# Altium PCB DE-151116.PcbDoc
Units mm, origin at the board's own origin, x right, y up, seen from the top; angles counter-clockwise.
Board outline 80 x 43 mm, 2 copper layers (Top Layer, Bottom Layer); 27 components, 18 nets, 67 pads, 0 vias.
Unrouted connection lines stored in the file: 1.
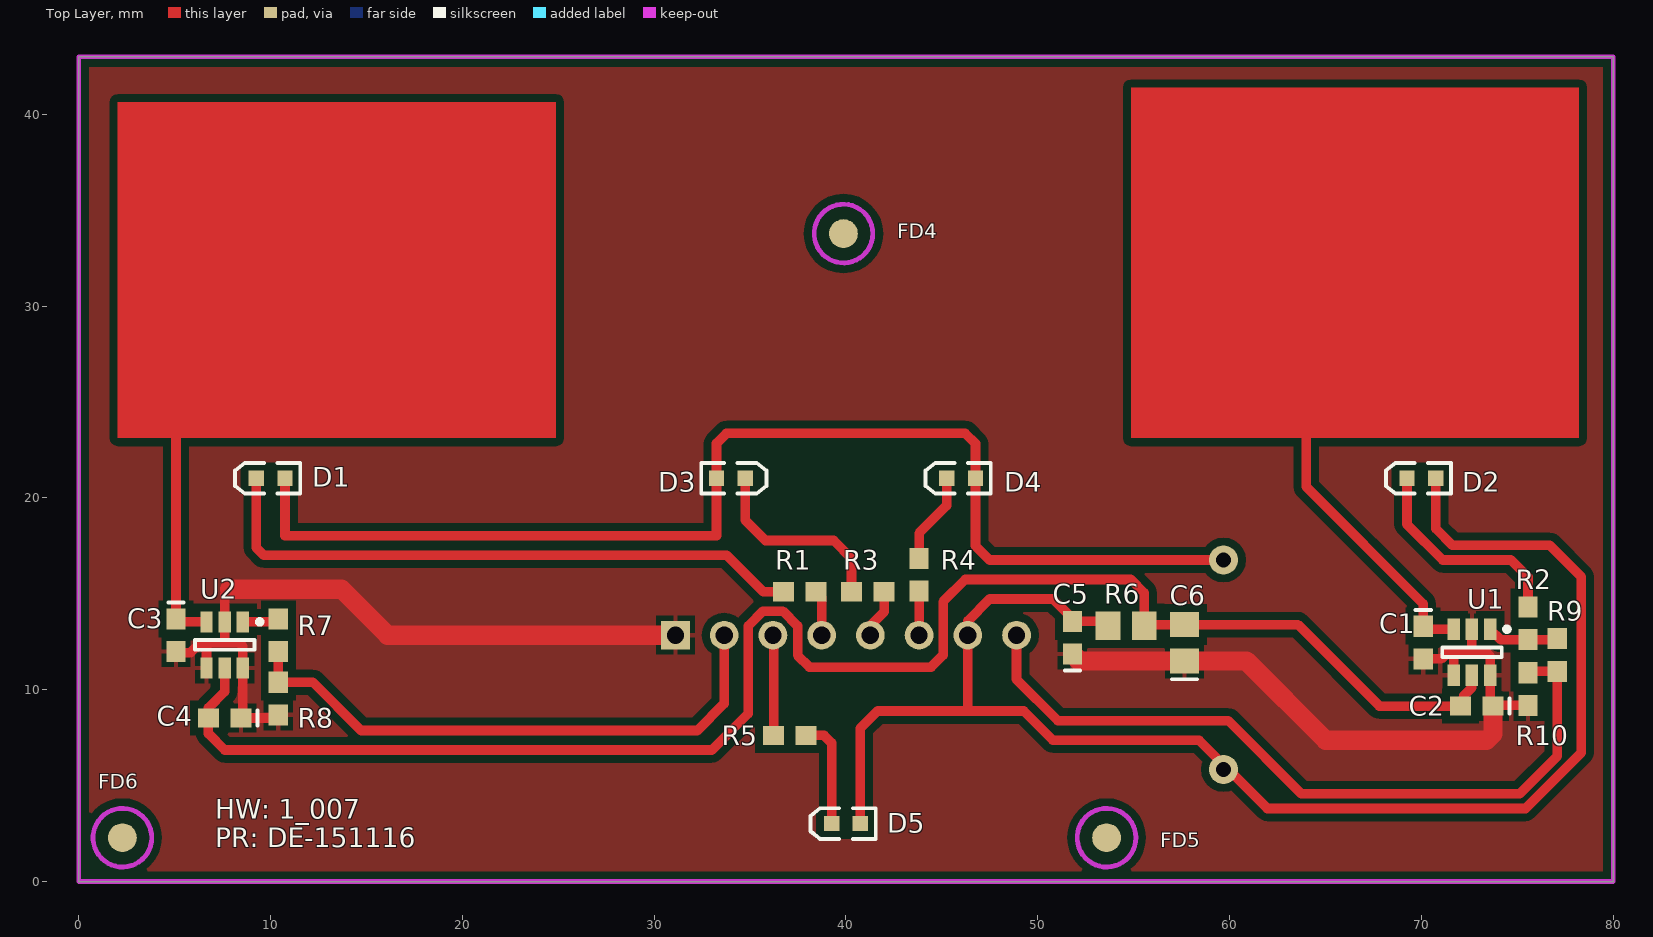
[diagram p0: Top Layer view]
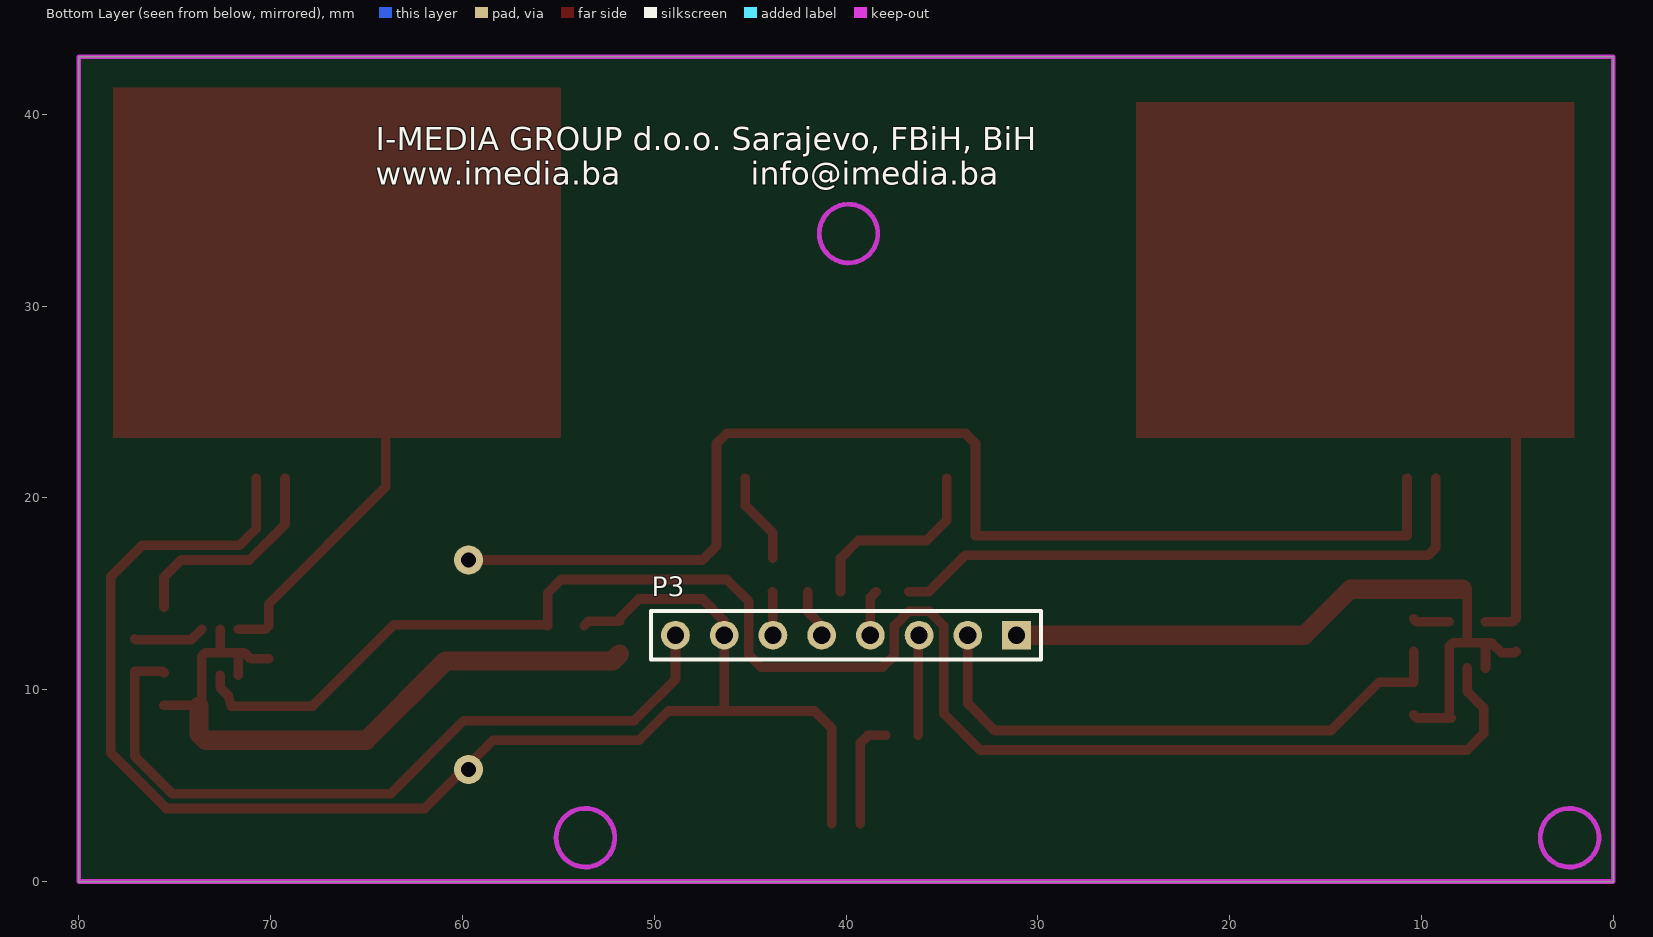
[diagram p1: Bottom Layer view, seen from below]

## Layer stack, top to bottom
Top Solder: solder mask 0.0102, Solder Resist, Dk 3.5
Top Layer: signal copper 0.0356
Dielectric 1: dielectric 0.32, FR-4, Dk 4.8
Bottom Layer: signal copper 0.0356
Bottom Solder: solder mask 0.0102, Solder Resist, Dk 3.5

## Board outline
0,0 80,0 80,43 0,43

## Design rules (kind name [scope] priority, off if disabled: settings)
Clearance [All] p1: gap=0.254 except(0.4: Arc-Poly Track-Poly SMDPad-Poly THPad-Poly Via-Poly Fill-Poly Poly-Poly)
PolygonConnect [All] p1: connectstyle=Relief reliefconductorwidth=0.254 reliefentries=4 polygonreliefangle="90 Angle" airgapwidth=0.254
RoutingVias [All] p1: holewidth=0.711 width=1.27 viastyle="Through Hole" minholewidth=0.711 minwidth=1.27 maxholewidth=0.711 maxwidth=1.27
SolderMaskExpansion [All] p1: expansion=0.102
Width [All] p1: maxlimit=5 minlimit=0.254 preferedwidth=0.5
30 further rules are at their usual default settings.

## Classes and differential pairs
component class DE-151116: C1 C2 C3 C4 C5 C6 D1 D2 D3 D4 D5 P3 R1 R2 R3 R4 R5 R6 R7 R8 R9 R10 U1 U2

## Components (designator, comment, footprint, x,y, rotation, side; value= is the part's Value field where it differs from the comment)
C1 "10pF" 0603 70.094,12.462 r270 top
C2 "C0603" 0603 72.888,9.144 r180 top
C3 "10pF" 0603 5.07,12.843 r270 top
C4 "100nF" 0603 7.61,8.525 r180 top
C5 "100nF" 0603 51.806,12.711 r90 top
C6 "4u7" 0805 57.648,12.446 r90 top
D1 "RED_LED" 1.6X0.8X0.8 10,21.024 r180 top
D2 "BLUE_LED" 1.6X0.8X0.8 70,21.024 r180 top
D3 "RED_LED" 1.6X0.8X0.8 34,21.024 r0 top
D4 "GREEN_LED" 1.6X0.8X0.8 46,21.024 r180 top
D5 "WHITE_LED" 1.6X0.8X0.8 40,3.024 r180 top
FD4 "Fiducial" Fiducial 39.868,33.782 r180 bottom
FD5 "Fiducial" Fiducial 53.584,2.286 r180 bottom (schematic designator FD4)
FD6 "Fiducial" Fiducial 2.276,2.286 r180 bottom (schematic designator FD4)
P3 "Header 8" HDR1X8 31.11,12.843 r0 bottom
R1 "330R" ERA-0603 37.582,15.113 r180 top
R2 "180R" ERA-0603 75.555,13.462 r90 top
R3 "330R" ERA-0603 41.138,15.113 r180 top
R4 "330R" ERA-0603 43.81,16.002 r90 top
R5 "180R" ERA-0603 37.074,7.62 r0 top
R6 "15R" ERA-0805 54.6,13.335 r0 top
R7 "2K2" ERA-0603 10.404,12.843 r270 top
R8 "3K3" ERA-0603 10.404,9.541 r270 top
R9 "2K2" ERA-0603 77.079,11.811 r270 top
R10 "3K3" ERA-0603 75.555,10.033 r270 top
U1 "TTP223-BA6" 6ST1_N 72.634,11.954 r270 top
U2 "TTP223-BA6" 6ST1_N 7.61,12.335 r270 top

## Footprints (in the part's own frame and the unit in brackets; to place one, negate y for a bottom-side part, rotate by r counter-clockwise, add the part's x,y. Pads: shape width x height; smd on the part's side, far side on the other; paste and mask are expansions set on the pad)
1.6X0.8X0.8 [mm] "SM LED; 2 Flat Leads"
  rect 0.8x0.8 smd: 1(-0.75,0) 2(0.75,0)
  silkscreen extent -1.55,-0.8 1.85,0.8
6ST1_N [mm] "SOT23, 6-Leads, Body 2.9x1.6mm, Pitch 0.95mm, Lead Span 2.7mm, IPC Medium Density"
  rect 1.1x0.65 smd: 1(-1.2,0.95) 2(-1.2,0) 3(-1.2,-0.95) 4(1.2,-0.95) 5(1.2,0) 6(1.2,0.95)
  silkscreen extent -1.32,-1.55 0.25,1.95, body extent -0.9,-1.55 0.9,1.55, height 1.45
0603 [mm] "Chip Capacitor; Body 1.6 x 0.8 mm (LxW typ)"
  rect 1.1x1 smd: 1(-0.85,0) 2(0.85,0)
  silkscreen extent -1.7,-0.4 -1.7,0.4
0805 [mm] "Chip Capacitor; Body 2.0 x 1.2 mm (LxW typ)"
  rect 1.3x1.5 smd: 1(-0.95,0) 2(0.95,0)
  silkscreen extent -1.9,-0.65 -1.9,0.65
ERA-0603 [mm] "Chip Resistor; Body 1.6 x 0.8 mm (LxW typ)"
  rect 1.1x1 smd: 1(-0.85,0) 2(0.85,0)
ERA-0805 [mm] "Chip Resistor; Body 2 x 1.3 mm (LxW typ)"
  rect 1.3x1.5 smd: 1(-0.95,0) 2(0.95,0)
Fiducial [mm] "Pick and place machine mark"
  round 1.5 smd far side paste+0 mask+0.8: 3(0,0)
  Keep-Out Layer circle w0.254: c0,0 r1.529
HDR1X8 [mm] "Connector; Header; 8 Position"
  rect 1.5x1.5 hole 0.9: 1(0,0)
  round 1.5 hole 0.9: 2(2.54,0) 3(5.08,0) 4(7.62,0) 5(10.16,0) 6(12.7,0) 7(15.24,0) 8(17.78,0)
  silkscreen extent -1.27,-1.27 19.05,1.27

## Part data
C1 C3 C4 C5: library part C0603, "Ceramic Chip Capacitor - Standard"
C2: "Ceramic Chip Capacitor - Standard"
C6: library part C0805, "Ceramic Chip Capacitor - Standard"
D1 D3: library part HSMC-C190, "High Performance Chip LED, Red"
D2: library part HSMB-C190, "Blue Surface Mount Chip LED, Blue"
D4: library part HSMM-C190, "High Performance SMT Chip LED, Green"
D5: library part HSMA-C190, "High Performance Chip LED, Amber"
FD4 FD5 FD6: library part Fiduchial, "Fiduchial mark"
P3: "Header, 8-Pin"
R1 R2 R3 R4 R5 R7 R8 R9 R10: library part ERAV, "Metal Film Thermosensitive Chip Resistor, 0.56 Ohm to 10k Ohm Range, 5% Tolerance, 0603 Size, 0.063 W"
R6: library part ERA6Y, "Rectangular Thick Film Chip Resistor, 10 Ohm to 1M Ohm Range, 0.1% and 0.5% Tolerance, 0805 Size, 0.1 W"
U1 U2: library part AT42QT1012, "One-channel Toggle-mode Touch Sensor IC with Power Management Functions, 6-pin SOT23"

## Free pads (board coordinates)
  round 1.524 hole 0.762: 2(59.68,5.842) 3(59.68,16.764)

## Nets (pads, with @x,y where several pads share a name; then routed paths per layer and width w, separated by ;. In a path a pad name is that pad's centre, name@x,y a point inside that pad or via, vN(x,y) a via of type N, cw(c..) or ccw(c..) an arc to the next point about the centre after c; other vN are vias at no path point)
+5V: C5.2 D1.1 D2.1 D3.1 D4.1 D5.1 P3.7 pad.2 pad.3 R6.1 | length 143
  Top Layer w0.5: D1.1 10.75,18.034 33.25,18.034 D3.1 33.25,22.846 33.772,23.368 46.218,23.368 46.75,22.836 D4.1 46.75,17.502 47.488,16.764 59.434,16.764 59.68,17.01 pad.3 ; D5.1 40.75,7.994 41.646,8.89 49.266,8.89 50.79,7.366 58.41,7.366 61.966,3.81 75.428,3.81 78.324,6.706 78.324,15.9 76.698,17.526 71.618,17.526 70.75,18.394 D2.1 ; 46.35,8.89 P3.7 46.35,13.594 47.488,14.732 50.79,14.732 51.806,13.716 C5.2 53.424,13.561 R6.1
DOOR_BELL_LED: R2.1 R9.1 U1.1 | length 3.7
  Top Layer w0.5: U1.1 74.126,12.612 R2.1 77.03,12.612 R9.1
DOOR_BELL_OUT: P3.8 R9.2 R10.1 | length 39.8
  Top Layer w0.5: P3.8 48.89,10.536 51.044,8.382 59.934,8.382 63.744,4.572 75.124,4.572 77.079,6.527 R9.2 75.633,10.961 R10.1
HANDMAID_LED: P3.4 R1.1 | length 2.4
  Top Layer w0.5: R1.1 38.73,14.815 P3.4
HANDMAID_TASTER: R7.1 U2.1 | length 1.9
  Top Layer w0.5: U2.1 10.246,13.535 R7.1
HM_TASTER_OUT: P3.2 R7.2 R8.1 | length 30
  Top Layer w0.5: R7.2 R8.1 12.205,10.391 14.722,7.874 32.248,7.874 33.65,9.276 P3.2
NetC1_1: C1.1 U1.3 | length 14
  Top Layer w0.5: 63.998,23.114 63.998,20.574 70.094,14.478 C1.1 70.252,13.154 U1.3
NetC3_1: C3.1 U2.3 | length 10.9
  Top Layer w0.5: C3.1 5.07,23.114 ; C3.1@5.228,13.535 U2.3
NetD1_2: D1.2 R1.2 | length 32
  Top Layer w0.5: D1.2 9.25,17.41 9.642,17.018 33.772,17.018 35.677,15.113 R1.2
NetD2_2: D2.2 R2.2 | length 11.4
  Top Layer w0.5: D2.2 69.25,18.624 71.11,16.764 74.666,16.764 75.555,15.875 R2.2
NetD3_2: D3.2 R3.2 | length 10.3
  Top Layer w0.5: D3.2 34.75,18.834 35.804,17.78 39.36,17.78 40.288,16.852 R3.2
NetD4_2: D4.2 R4.2 | length 4.8
  Top Layer w0.5: R4.2 43.81,18.166 45.25,19.606 D4.2
NetD5_2: D5.2 R5.2 | length 5.7
  Top Layer w0.5: R5.2 38.852,7.62 39.25,7.222 D5.2
RF_READER_LED: P3.3 R5.1 | length 5.2
  Top Layer w0.5: P3.3 36.224,12.809 R5.1
ROOM_STATUS_LED_1: P3.5 R3.1 | length 2.6
  Top Layer w0.5: P3.5 41.27,13.34 41.988,14.058 R3.1
ROOM_STATUS_LED_2: P3.6 R4.1 | length 2.3
  Top Layer w0.5: P3.6 43.81,15.079 R4.1@43.844,15.113
VDD: C2.2 C4.2 C6.2 R6.2 U1.5 U2.5 | length 86.3
  Top Layer w0.5: U2.5 7.61,9.906 6.76,9.056 C4.2 6.76,7.708 7.61,6.858 33.01,6.858 34.904,8.752 34.904,13.33 35.671,14.097 36.709,14.097 37.476,13.33 37.476,11.79 38.09,11.176 44.44,11.176 45.064,11.8 45.064,14.594 46.218,15.748 54.854,15.748 55.55,15.052 R6.2 55.611,13.396 C6.2 63.556,13.396 67.808,9.144 C2.2 72.218,9.7 72.634,10.116 U1.5
VSS: C1.2 C2.1 C3.2 C4.1 C5.1 C6.1 P3.1 R8.2 R10.2 U1.2 U1.4 U1.6 U2.2 U2.4 U2.6 | length 73.9
  Top Layer w0.5: C3.2 5.125,11.938 5.832,11.938 6.34,12.446 6.594,12.446 ; U2.4 6.66,12.38 6.594,12.446 ; 7.864,15.24 7.61,14.986 U2.2 7.61,12.446 ; R8.2 10.238,8.525 C4.1 8.56,8.625 U2.6 8.56,12.258 8.372,12.446 7.61,12.446 ; C1.2 71.038,11.612 71.364,11.938 72.634,11.938 ; U1.4 71.684,11.872 ; U1.2 72.634,11.938 ; R10.2 73.777,9.183 73.584,9.376 U1.6 73.584,11.75 73.396,11.938 72.634,11.938 ; 6.594,12.446 7.61,12.446
  Top Layer w1: 7.864,15.24 13.706,15.24 16.103,12.843 P3.1 ; C5.1 52.171,11.496 C6.1 60.884,11.496 65.014,7.366 73.396,7.366 73.738,7.708 C2.1
pads on no net: FD4.3 FD5.3 FD6.3

## Polygon pours and split planes (outlines as drawn)
VSS on Top Layer "VSS" (solid, remove dead copper, pour order 0): 80,42.926 -0.01,42.926 -0.01,0 80,0 80,42.926

## Keep-outs
Keep-Out Layer:
  the board outline again, w0.254

## Other copper
Top Layer:
  region net NetC1_1: 78.222,41.402 54.854,41.402 54.854,23.114 78.222,23.114
  region net NetC3_1: 24.882,40.64 2.022,40.64 2.022,23.114 24.882,23.114

## Silkscreen, mask and mechanical layers (free items; w line width, h text height)
Top Overlay:
  text "HW: 1_007 / PR: DE-151116" at 7.112,1.778 h1
Bottom Overlay:
  text "I-MEDIA GROUP d.o.o. Sarajevo, FBiH, BiH / www.imedia.ba             info@imedia.ba" at 64.516,36.322 h1.2

## Dimensions
80,43 to 80,0 on Mechanical 13
80,43 to 0,43 on Mechanical 13